# Altium PCB TarjetaModulo.PcbDoc
Units mil, origin at the board's own origin, x right, y up, seen from the top; angles counter-clockwise.
Board outline 4150 x 3010 mil, 2 copper layers (Top Layer, Bottom Layer); 40 components, 28 nets, 131 pads, 0 vias.
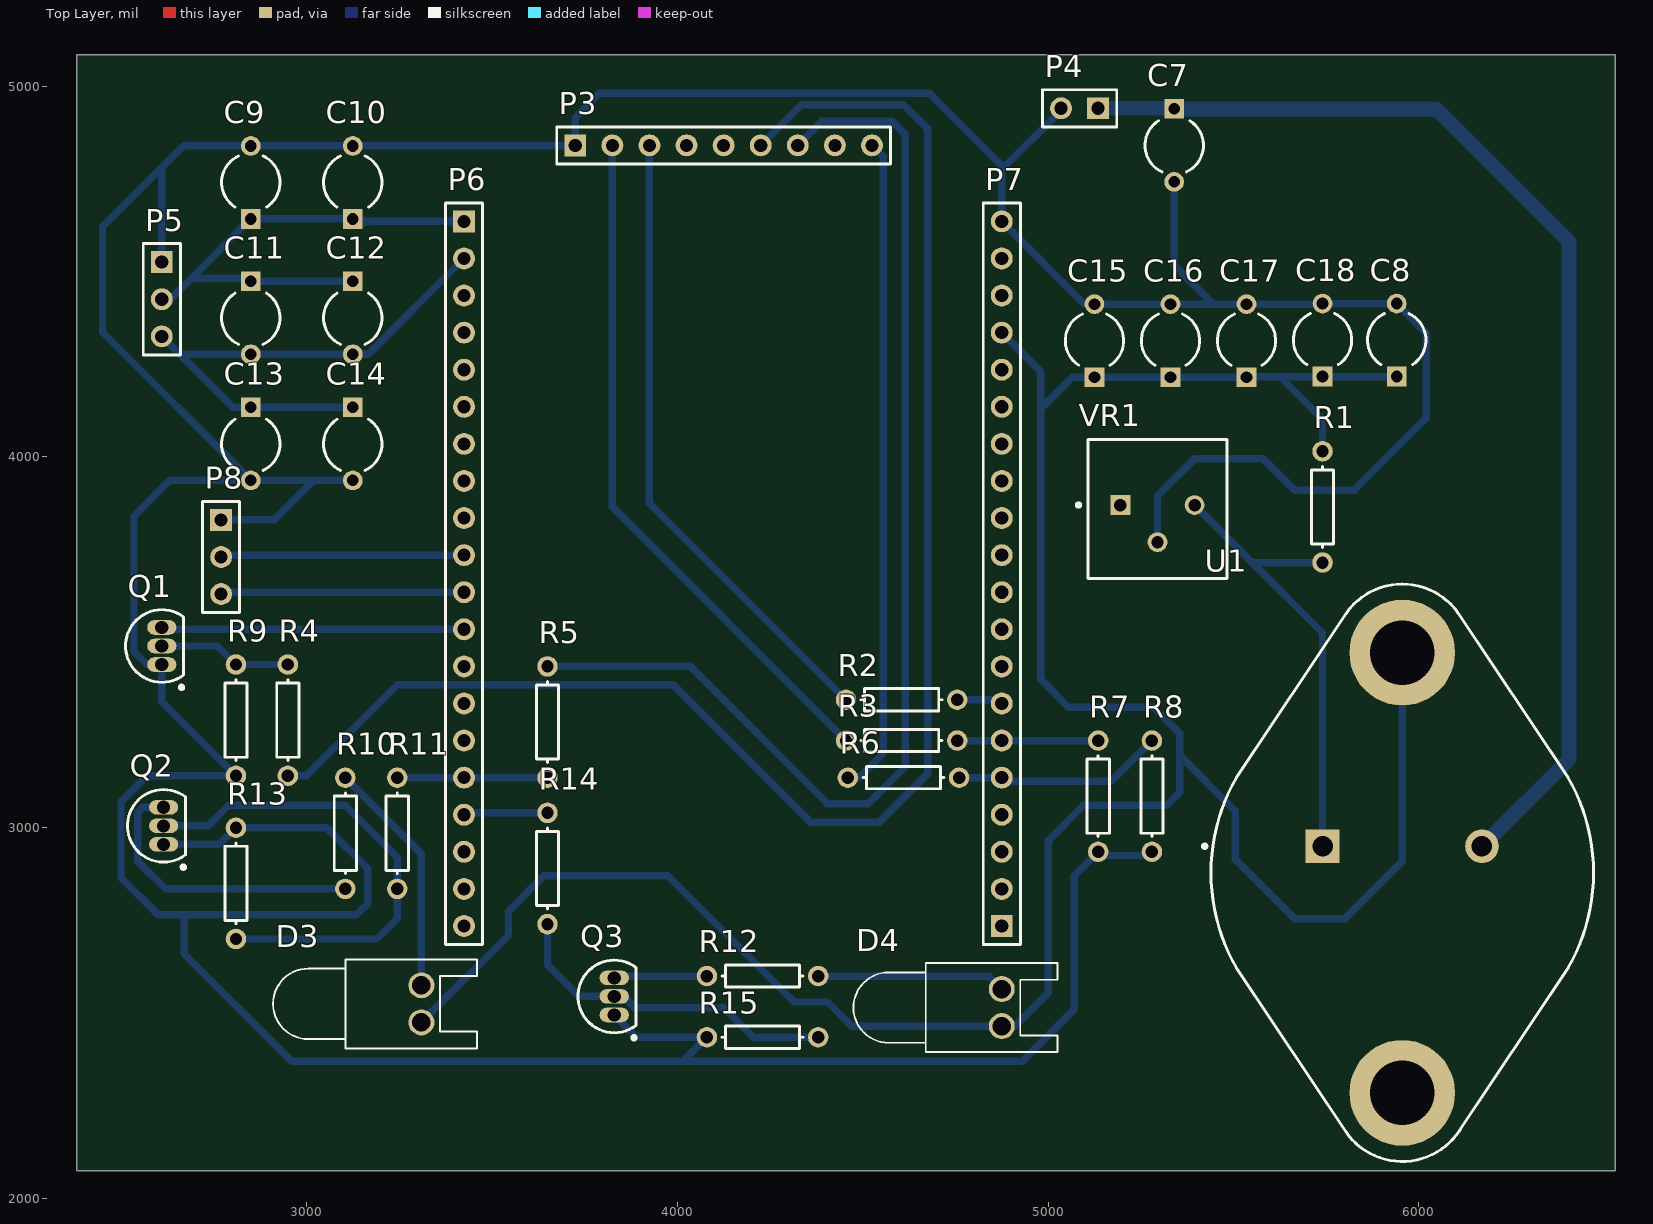
[diagram p0: Top Layer view]
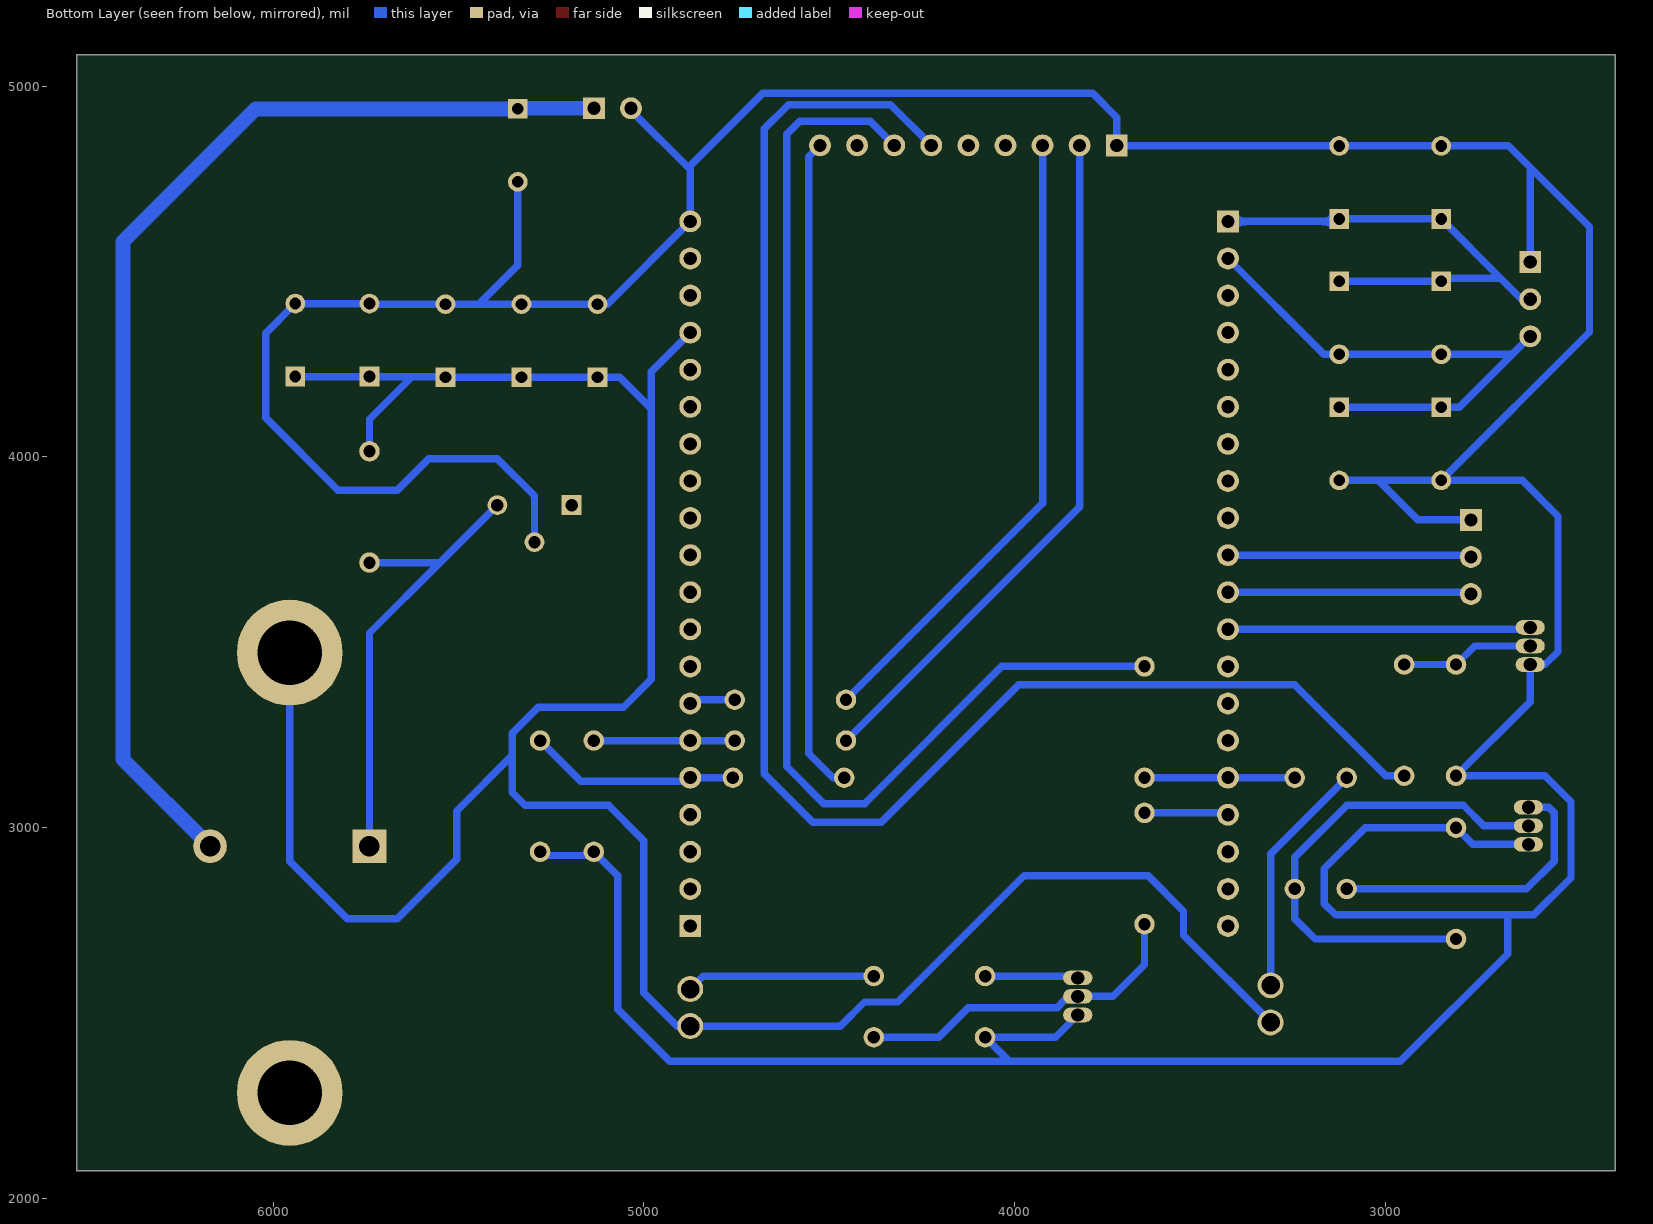
[diagram p1: Bottom Layer view, seen from below]

## Layer stack, top to bottom
Top Solder: solder mask 0.4, Solder Resist, Dk 3.5
Top Layer: signal copper 1.4
Dielectric 1: dielectric 12.6, FR-4, Dk 4.8
Bottom Layer: signal copper 1.4
Bottom Solder: solder mask 0.4, Solder Resist, Dk 3.5

## Board outline
2380,2075 6530,2075 6530,5085 2380,5085

## Design rules (kind name [scope] priority, off if disabled: settings)
Clearance [All] p1: gap=10 ignorepadtopadclearanceinfootprint=FALSE except(0: Arc-Hole Track-Hole SMDPad-Hole THPad-Hole Via-Hole Fill-Hole Poly-Hole Region-Hole Text-Hole)
PolygonConnect [All] p1: connectstyle=Relief reliefconductorwidth=10 reliefentries=4 polygonreliefangle="90 Angle" airgapwidth=10
RoomDefinition TarjetaModulo [InComponentClass('TarjetaModulo')] p1: confinementstyle=ConfineIn formatcopy=TRUE lockcomponents=FALSE outline 0,0 2000,0 2000,1000 0,1000
RoutingVias [All] p1: holewidth=28 width=50 viastyle="Through Hole" minholewidth=28 minwidth=50 maxholewidth=28 maxwidth=50
SolderMaskExpansion [All] p1: expansion=4
Width [All] p1: maxlimit=20 minlimit=20 preferedwidth=20 minimp=50.000000 maximp=50.000000 favimp=50.000000
30 further rules are at their usual default settings.

## Components (designator, comment, footprint, x,y, rotation, side; value= is the part's Value field where it differs from the comment)
C7 "Cap2" CAPR5-4X5 5340,4840 r270 top value=0.1uF
C8 "Cap2" CAPR5-4X5 5940,4315 r90 top value=1uF
C9 "Cap2" CAPR5-4X5 2850,4740 r90 top value=33pF
C10 "Cap2" CAPR5-4X5 3125,4740 r90 top value=10pF
C11 "Cap2" CAPR5-4X5 2850,4375 r270 top value=33pF
C12 "Cap2" CAPR5-4X5 3125,4375 r270 top value=10pF
C13 "Cap2" CAPR5-4X5 2850,4035 r270 top value=33pF
C14 "Cap2" CAPR5-4X5 3125,4035 r270 top value=10pF
C15 "Cap2" CAPR5-4X5 5125,4313.43 r90 top value=2200uF
C16 "Cap2" CAPR5-4X5 5330,4313.43 r90 top value=2200uF
C17 "Cap2" CAPR5-4X5 5535,4313.43 r90 top value=470uF
C18 "Cap2" CAPR5-4X5 5740,4315 r90 top value=470uF
D3 "LED0" LED-0 3310,2525 r270 top
D4 "LED0" LED-0 4875,2515 r270 top
P3 "Header 9" HDR1X9 3725,4840 r0 top
P4 "Header 2" HDR1X2 5135,4940 r180 top
P5 "Header 3" HDR1X3 2610,4525 r270 top
P6 "Header 20" HDR1X20 3425,4635 r270 top
P7 "Header 20" HDR1X20 4875,2735 r90 top
P8 "Header 3" HDR1X3 2770,3830 r270 top
Q1 "2N2222" TO-92A 2610,3490 r0 top
Q2 "2N2222" TO-92A 2615,3005 r0 top
Q3 "2N2222" TO-92A 3830,2545 r0 top
R1 "Res1" AXIAL-0.3 5740,3865 r270 top value=300
R2 "Res1" AXIAL-0.3 4605,3345 r0 top value=1K
R3 "Res1" AXIAL-0.3 4605,3235 r0 top value=1K
R4 "Res1" AXIAL-0.3 2950,3290 r90 top value=4.7K
R5 "Res1" AXIAL-0.3 3650,3285 r90 top value=0
R6 "Res1" AXIAL-0.3 4610,3135 r0 top value=1K
R7 "Res1" AXIAL-0.3 5135,3085 r270 top value=5.6K
R8 "Res1" AXIAL-0.3 5280,3085 r270 top value=5.6K
R9 "Res1" AXIAL-0.3 2810,3290 r270 top value=47K
R10 "Res1" AXIAL-0.3 3105,2985 r90 top value=300
R11 "Res1" AXIAL-0.3 3245,2985 r270 top value=4.7K
R12 "Res1" AXIAL-0.3 4230,2600 r0 top value=300
R13 "Res1" AXIAL-0.3 2810,2850 r90 top value=47K
R14 "Res1" AXIAL-0.3 3650,2890 r270 top value=4.7K
R15 "Res1" AXIAL-0.3 4230,2435 r180 top value=47K
U1 "LM338K" TO-3R 5954.96,2878.54 r270 top
VR1 "M63P103KB30T607" VISH-M63P103KB30T607 5295,3859.76 r0 top

## Footprints (in the part's own frame and the unit in brackets; to place one, negate y for a bottom-side part, rotate by r counter-clockwise, add the part's x,y. Pads: shape width x height; smd on the part's side, far side on the other; paste and mask are expansions set on the pad)
AXIAL-0.3 [mm] "Axial Device, Thru-Hole; 2 Leads; 0.3 in Pin Spacing"
  round 1.4 hole 0.85: 1(-3.81,0) 2(3.81,0)
  silkscreen extent -2.77,-0.76 2.77,0.76
CAPR5-4X5 [mm] "Capacitor; 2 Leads"
  rect 1.35x1.35 hole 0.8: 1(-2.5,0)
  round 1.35 hole 0.8: 2(2.5,0)
  silkscreen extent -1.69,-2 1.82,2
HDR1X2 [mm] "Connector; Header; 2 Position"
  rect 1.5x1.5 hole 0.9: 1(0,0)
  round 1.5 hole 0.9: 2(2.54,0)
  silkscreen extent -1.27,-1.27 3.81,1.27
HDR1X3 [mm] "Connector; Header; 3 Position"
  rect 1.5x1.5 hole 0.9: 1(0,0)
  round 1.5 hole 0.9: 2(2.54,0) 3(5.08,0)
  silkscreen extent -1.27,-1.27 6.35,1.27
HDR1X9 [mm] "Connector; Header; 9 Position"
  rect 1.5x1.5 hole 0.9: 1(0,0)
  round 1.5 hole 0.9: 2(2.54,0) 3(5.08,0) 4(7.62,0) 5(10.16,0) 6(12.7,0) 7(15.24,0) 8(17.78,0) 9(20.32,0)
  silkscreen extent -1.27,-1.27 21.59,1.27
HDR1X20 [mm] "Connector; Header; 20 Position"
  rect 1.5x1.5 hole 0.9: 1(0,0)
  round 1.5 hole 0.9: 2(2.54,0) 3(5.08,0) 4(7.62,0) 5(10.16,0) 6(12.7,0) 7(15.24,0) 8(17.78,0) 9(20.32,0) 10(22.86,0) 11(25.4,0) 12(27.94,0) 13(30.48,0) 14(33.02,0) 15(35.56,0) 16(38.1,0) 17(40.64,0) 18(43.18,0) 19(45.72,0) 20(48.26,0)
  silkscreen extent -1.27,-1.27 49.53,1.27
LED-0 [mil] "LED; 2 Leads"
  round 70 hole 50: 1(50,0) 2(-50,0)
  silkscreen extent -120,-400 120,150
TO-3R [mm] "Oval Flange Mount with (2) Offset Leads; Pin Spacing 10.92 mm; Lead Dia. 1.1 mm (max)"
  rect 2.3x2.3 hole 1.4: 1(-1.815,-5.46)
  round 2.3 hole 1.4: 2(-1.815,5.46)
  round 7.25 hole 4.4: 3(-15.075,0) 4(15.075,0)
  silkscreen extent -19.77,-13.65 19.77,13.1, body extent -19.78,-13.1 19.78,13.1, height 8.7
TO-92A [mm] "TO, Flat Index; 3 In-Line, Axial Leads; Body Dia. 4.5mm; Leads 0.51 x 0.48 mm (max)"
  oval 2x1 hole 0.9: 1(0,-1.27) 2(0,0) 3(0,1.27)
  silkscreen extent -2.48,-2.95 1.5,2.48, body extent -2.48,-2.5 1.5,2.5, height 6.86
VISH-M63P103KB30T607 [mm] "THD, 3-Leads, Body 9.52x9.52mm, Pitch 2.54mm"
  rect 1.35x1.35 hole 0.85: 1(-2.54,0.26)
  round 1.35 hole 0.85: 2(0,-2.28) 3(2.54,0.26)
  silkscreen extent -5.53,-4.76 4.76,4.76, body extent -4.76,-4.76 4.76,4.76, height 10.91

## Part data
C7 C8 C9 C10 C11 C12 C13 C14 C15 C16 C17 C18: "Capacitor", PackageDescription="Capacitor; 2 Leads", PackageReference=CAPR5-4X5, Published=23-Sep-2002, Publisher="Altium Limited"
D3 D4: "Typical INFRARED GaAs LED", LatestRevisionDate=08-Jul-2005, LatestRevisionNote="Mech Layer 1 removed.", PackageDescription="LED; 2 Leads", PackageReference=LED-0, Published=8-Jun-2000, Publisher="Altium Limited"
P3: "Header, 9-Pin", LatestRevisionDate=17-Jul-2002, LatestRevisionNote="Re-released for DXP Platform.", Publisher="Altium Limited"
P4: "Header, 2-Pin", LatestRevisionDate=17-Jul-2002, LatestRevisionNote="Re-released for DXP Platform.", Publisher="Altium Limited"
P5 P8: "Header, 3-Pin", LatestRevisionDate=17-Jul-2002, LatestRevisionNote="Re-released for DXP Platform.", Publisher="Altium Limited"
P6 P7: "Header, 20-Pin", LatestRevisionDate=17-Jul-2002, LatestRevisionNote="Re-released for DXP Platform.", Publisher="Altium Limited"
Q1 Q2 Q3: library part 2N3904, "NPN General Purpose Amplifier", ComponentLink1Description="Manufacturer Link", ComponentLink1URL=http://www.fairchildsemi.com/, ComponentLink2Description=Datasheet, ComponentLink2URL=http://www.fairchildsemi.com/ds/2N%2F2N3904.pdf, DatasheetVersion=1997, LatestRevisionDate=15-Jan-2003, LatestRevisionNote="PCB Footprint 'BCY-W3/D4.7' replaced", PackageDescription="TO, Flat Index; 3 In-Line, Axial Leads; Body Dia. 4.5mm; Leads 0.51 x 0.48 mm (max)", PackageReference=TO-92A, PackageVersion=Sep-1998, Published=8-Jun-2000, Publisher="Altium Limited"
R1 R2 R3 R4 R5 R6 R7 R8 R9 R10 R11 R12 R13 R14 R15: "Resistor", LatestRevisionDate=17-Jul-2002, LatestRevisionNote="Re-released for DXP Platform.", PackageDescription="Axial Device, Thru-Hole; 2 Leads; 0.3 in Pin Spacing", PackageReference=AXIAL-0.3, Published=8-Jun-2000, Publisher="Altium Limited"
U1: library part CMP-0244-00044-1, "Three-Terminal 5 A Adjustable Voltage Regulator, 0 °C to 125 °C, 3-Pin TO-3", ComponentLink1Description="Manufacturer URL", ComponentLink1URL=http://www.st.com, ComponentLink2Description=Datasheet, ComponentLink2URL=http://www.st.com/internet/com/TECHNICAL_RESOURCES/TECHNICAL_LITERATURE/DATASHEET/CD00000548.pdf, ComponentLink3Description="Package Specification", ComponentLink3URL=http://www.st.com/internet/com/TECHNICAL_RESOURCES/TECHNICAL_LITERATURE/PACKAGE_INFORMATION/CD00004846.pdf, DatasheetVersion=1/04/2008, PackageDescription="Oval Flange Mount with (2) Offset Leads; Pin Spacing 10.92 mm; Lead Dia. 1.1 mm (max)", PackageReference=TO-3R, PackageVersion="ver1.0, Nov-2002"
VR1: library part CMP-1666-00012-6, "Single-Turn Cermet Trimmer, 10 KOhm, -55 to 125 degC, 3-Pin THD, RoHS, Bulk", Manufacturer="Vishay Semiconductor", ComponentLink1Description="Manufacturer URL", ComponentLink1URL=http://www.vishay.com/, ComponentLink2Description=Datasheet, ComponentLink2URL=http://120.52.73.14/www.mouser.com/ds/2/427/63-239923.pdf, DatasheetVersion=09/2015, Mounting Technology="Through Hole", PackageDescription="3-Pin Through Hole Device, Body 9.52 x 9.52 mm, Pitch 2.54 mm", PackageReference=M63P103KB30T607

## Nets (pads, with @x,y where several pads share a name; then routed paths per layer and width w, separated by ;. In a path a pad name is that pad's centre, name@x,y a point inside that pad or via, vN(x,y) a via of type N, cw(c..) or ccw(c..) an arc to the next point about the centre after c; other vN are vias at no path point)
6P9V: C7.1 P4.1 U1.2 | length 3146.5
  Bottom Layer w20: C7.1@5338.43,4940 C7.1
  Bottom Layer w40: P4.1 C7.1@5338.43,4940 ; C7.1 6046.57,4938.43 6405,4580 6405,3185.08 U1.2
DTR: P3.9 R6.1 | length 1774.4
  Bottom Layer w20: R6.1 4490,3135 4555,3200 4555,4810 P3.9
GND: C7.2 C8.2 C9.2 C10.2 C13.2 C14.2 C15.2 C16.2 C17.2 C18.2 P3.1 P4.2 P5.1 P7.20 P8.1 Q1.1 Q2.1 Q3.1 R7.2 R8.2 R9.2 R13.2 R15.2 VR1.2 | length 14446
  Bottom Layer w20: P5.1 2610,4770 2605,4775 ; Q2.1 2765,2955 R13.2 3055,3000 3165,2890 3165,2795 3135,2765 2670,2765 ; P8.1 2913.43,3830 3020,3936.57 ; C14.2 3020,3936.57 ; Q3.1 3890,2435 R15.2 4015,2370 ; P4.2 5035,4935 4875,4775 ; R7.2@5135,2925 5270,2925 R8.2 ; R7.2 5070,2870 5070,2510 4930,2370 4015,2370 ; VR1.2 5295,3895 5395,3995 5580,3995 5665,3910 5825,3910 6020,4105 6020,4333.43 C8.2 C18.2 5738.43,4411.85 C17.2 5445,4411.85 ; C7.2 5340,4516.85 5445,4411.85 ; 2605,4775 2668.43,4838.43 C9.2 C10.2 3723.43,4838.43 P3.1 3725,4915 3790,4980 4680,4980 4875,4785 4875,4775 ; 2605,4775 2450,4620 2450,4336.57 C13.2 ; 2670,2765 2600,2765 2500,2865 2500,3070 2570,3140 R9.2 2610,3340 Q1.1 2570,3440 2535,3475 2535,3840 2631.57,3936.57 C13.2 ; 2670,2765 2670,2660 2960,2370 4015,2370 ; C13.2 3020,3936.57 ; 4875,4775 P7.20 5098.15,4411.85 C15.2 C16.2 5445,4411.85
LOUDSPKN: P6.10 P8.2 | length 657.1
  Bottom Layer w20: P8.2 2775,3735 P6.10
LOUDSPKP: P6.11 P8.3 | length 657.1
  Bottom Layer w20: P8.3 2775,3635 P6.11
MIC2N: C11.2 C12.2 C13.1 C14.1 P5.3 P6.2 | length 1468
  Bottom Layer w20: P5.3 2658.43,4276.57 ; C14.1 C13.1 2801.57,4133.43 2658.43,4276.57 ; P6.2 3166.57,4276.57 C12.2 C11.2 2658.43,4276.57
MIC2P: C9.1 C10.1 C11.1 C12.1 P5.2 P6.1 | length 1345.8
  Bottom Layer w10: C10.1 C10.1@3131.57,4635
  Bottom Layer w20: P5.2 2633.42,4425 2690,4481.58 ; C12.1 C11.1 2841.85,4481.58 2690,4481.58 ; C10.1 C9.1 2690,4481.58 ; C10.1@3131.57,4635 P6.1
NetD3_2: D3.2 R10.2 | length 653.2
  Bottom Layer w20: R10.2 3310,2930 3310,2595 D3.2@3290,2575
NetD4_2: D4.2 R12.2 | length 509.5
  Bottom Layer w20: R12.2 4840,2600 D4.2
NETLIGHT: P6.17 R14.1 | length 227.1
  Bottom Layer w20: P6.17 3430,3040 R14.1
NetP7_5: P7.5 R6.2 R8.1 | length 569.7
  Bottom Layer w20: R6.2 P7.5 4885,3125 5170,3125 R8.1
NetP7_6: P7.6 R3.2 R7.1 | length 380
  Bottom Layer w20: R3.2 P7.6 R7.1
NetP7_7: P7.7 R2.2 | length 124.1
  Bottom Layer w20: R2.2 4865,3345 P7.7
NetQ1_2: Q1.2 R4.2 R9.1 | length 360.7
  Bottom Layer w20: Q1.2 2760,3490 R9.1 R4.2
NetQ2_2: Q2.2 R11.2 R13.1 | length 1333.6
  Bottom Layer w20: Q2.2 2735,3005 2790,3060 3105,3060 3245,2920 R11.2 3245,2755 3190,2700 R13.1
NetQ2_3: Q2.3 R10.1 | length 797.3
  Bottom Layer w20: Q2.3 2560,3055 2545,3040 2545,2910 2620,2835 R10.1
NetQ3_2: Q3.2 R14.2 R15.1 | length 920.8
  Bottom Layer w20: R14.2 3650,2630 3735,2545 Q3.2 3840.32,2534.68 3866.12,2534.68 3885.81,2515 4125,2515 4205,2435 R15.1
NetQ3_3: Q3.3 R12.1 | length 252.1
  Bottom Layer w20: Q3.3 3835,2600 R12.1
NetR1_2: R1.2 U1.1 VR1.3 | length 1252.9
  Bottom Layer w20: VR1.3 5550,3715 ; U1.1 5740,3525 5550,3715 ; R1.2 5550,3715
P1: 
P2: 
PWR: P3.6 R4.1 | length 4296.5
  Bottom Layer w20: R4.1 3000,3140 3245.47,3385.47 3989.53,3385.47 4360,3015 4545,3015 4675,3145 4675,4885 4610,4950 4335,4950 P3.6
PWRKEY: P6.12 Q1.3 | length 817.1
  Bottom Layer w20: Q1.3 2615,3535 P6.12
RXm: P3.2 R3.1 | length 1866
  Bottom Layer w20: P3.2 3825,3865 R3.1
STA: P3.7 R5.2 | length 3196.1
  Bottom Layer w20: R5.2 4035,3435 4405,3065 4515,3065 4615,3165 4615,4870 4580,4905 4390,4905 P3.7
STATUS: P6.16 R5.1 R11.1 | length 405
  Bottom Layer w20: R11.1 P6.16 R5.1
TXm: P3.3 R2.1 | length 1714.5
  Bottom Layer w20: P3.3 3925,3875 R2.1
VBAT: C8.1 C15.1 C16.1 C17.1 C18.1 D3.1 D4.1 P7.17 R1.1 U1.3 | length 7238.8
  Bottom Layer w20: D3.1@3310,2495 D3.1 3545,2710 3545,2775 3640,2870 3975,2870 4315,2530 4405,2530 4470,2465 D4.1 4910,2465 5000,2555 5000,2965 5095,3060 5320,3060 5355,3095 5355,3195 ; P7.17 4980,4230 4980,4130 ; R1.1 5740,4101.57 5625,4216.57 ; C8.1 C18.1 5625,4216.57 ; U1.3 5954.96,2909.96 5800,2755 5665,2755 5505,2915 5505,3045 5355,3195 ; 4980,4130 4980,3400 5055,3325 5285,3325 5355,3255 5355,3195 ; 4980,4130 5065,4215 C15.1 C16.1 C17.1 5536.57,4216.57 5625,4216.57
pads on no net: P3.4 P3.5 P3.8 P6.3 P6.4 P6.5 P6.6 P6.7 P6.8 P6.9 P6.13 P6.14 P6.15 P6.18 P6.19 P6.20 P7.1 P7.2 P7.3 P7.4 P7.8 P7.9 P7.10 P7.11 P7.12 P7.13 P7.14 P7.15 P7.16 P7.18 P7.19 U1.4 VR1.1